# Altium PCB SolarNode.PcbDoc (part 1 of 2)
Units mil, origin at the board's own origin, x right, y up, seen from the top; angles counter-clockwise.
Board outline 7598.43 x 6553.62 mil, 2 copper layers (Top Layer, Bottom Layer); 223 components, 193 nets, 759 pads, 133 vias.
Unrouted connection lines stored in the file: 164.
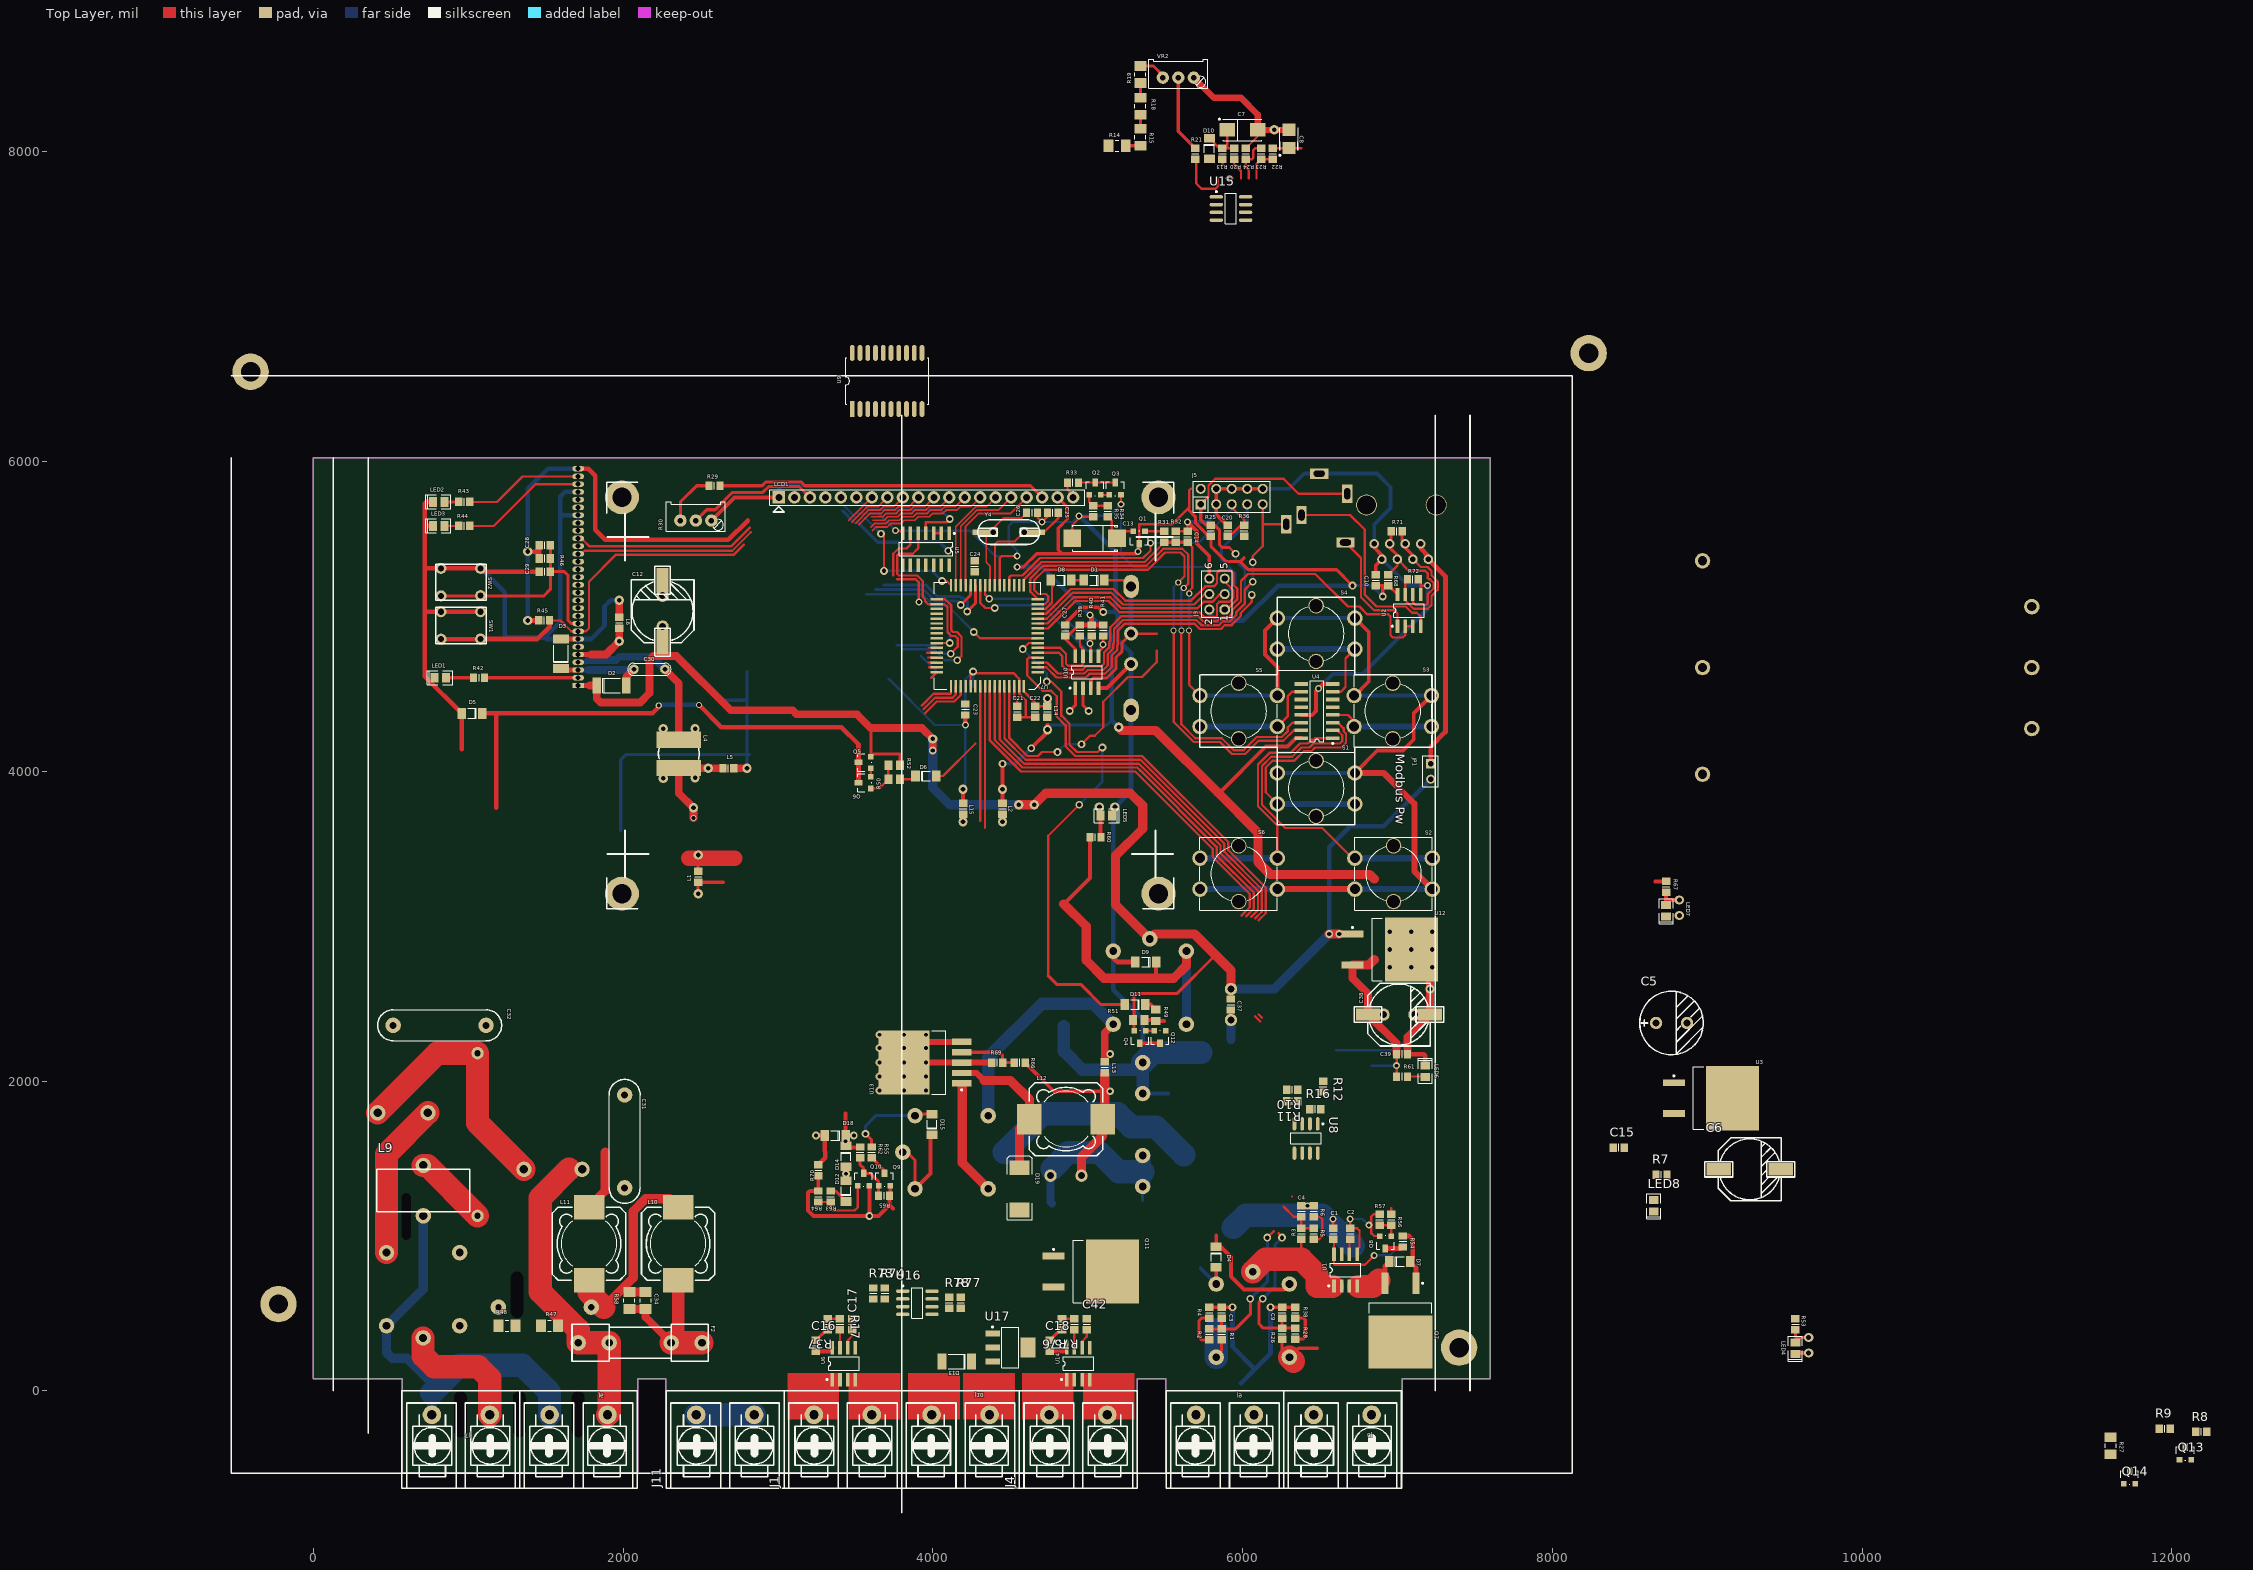
[diagram p0: Top Layer view]
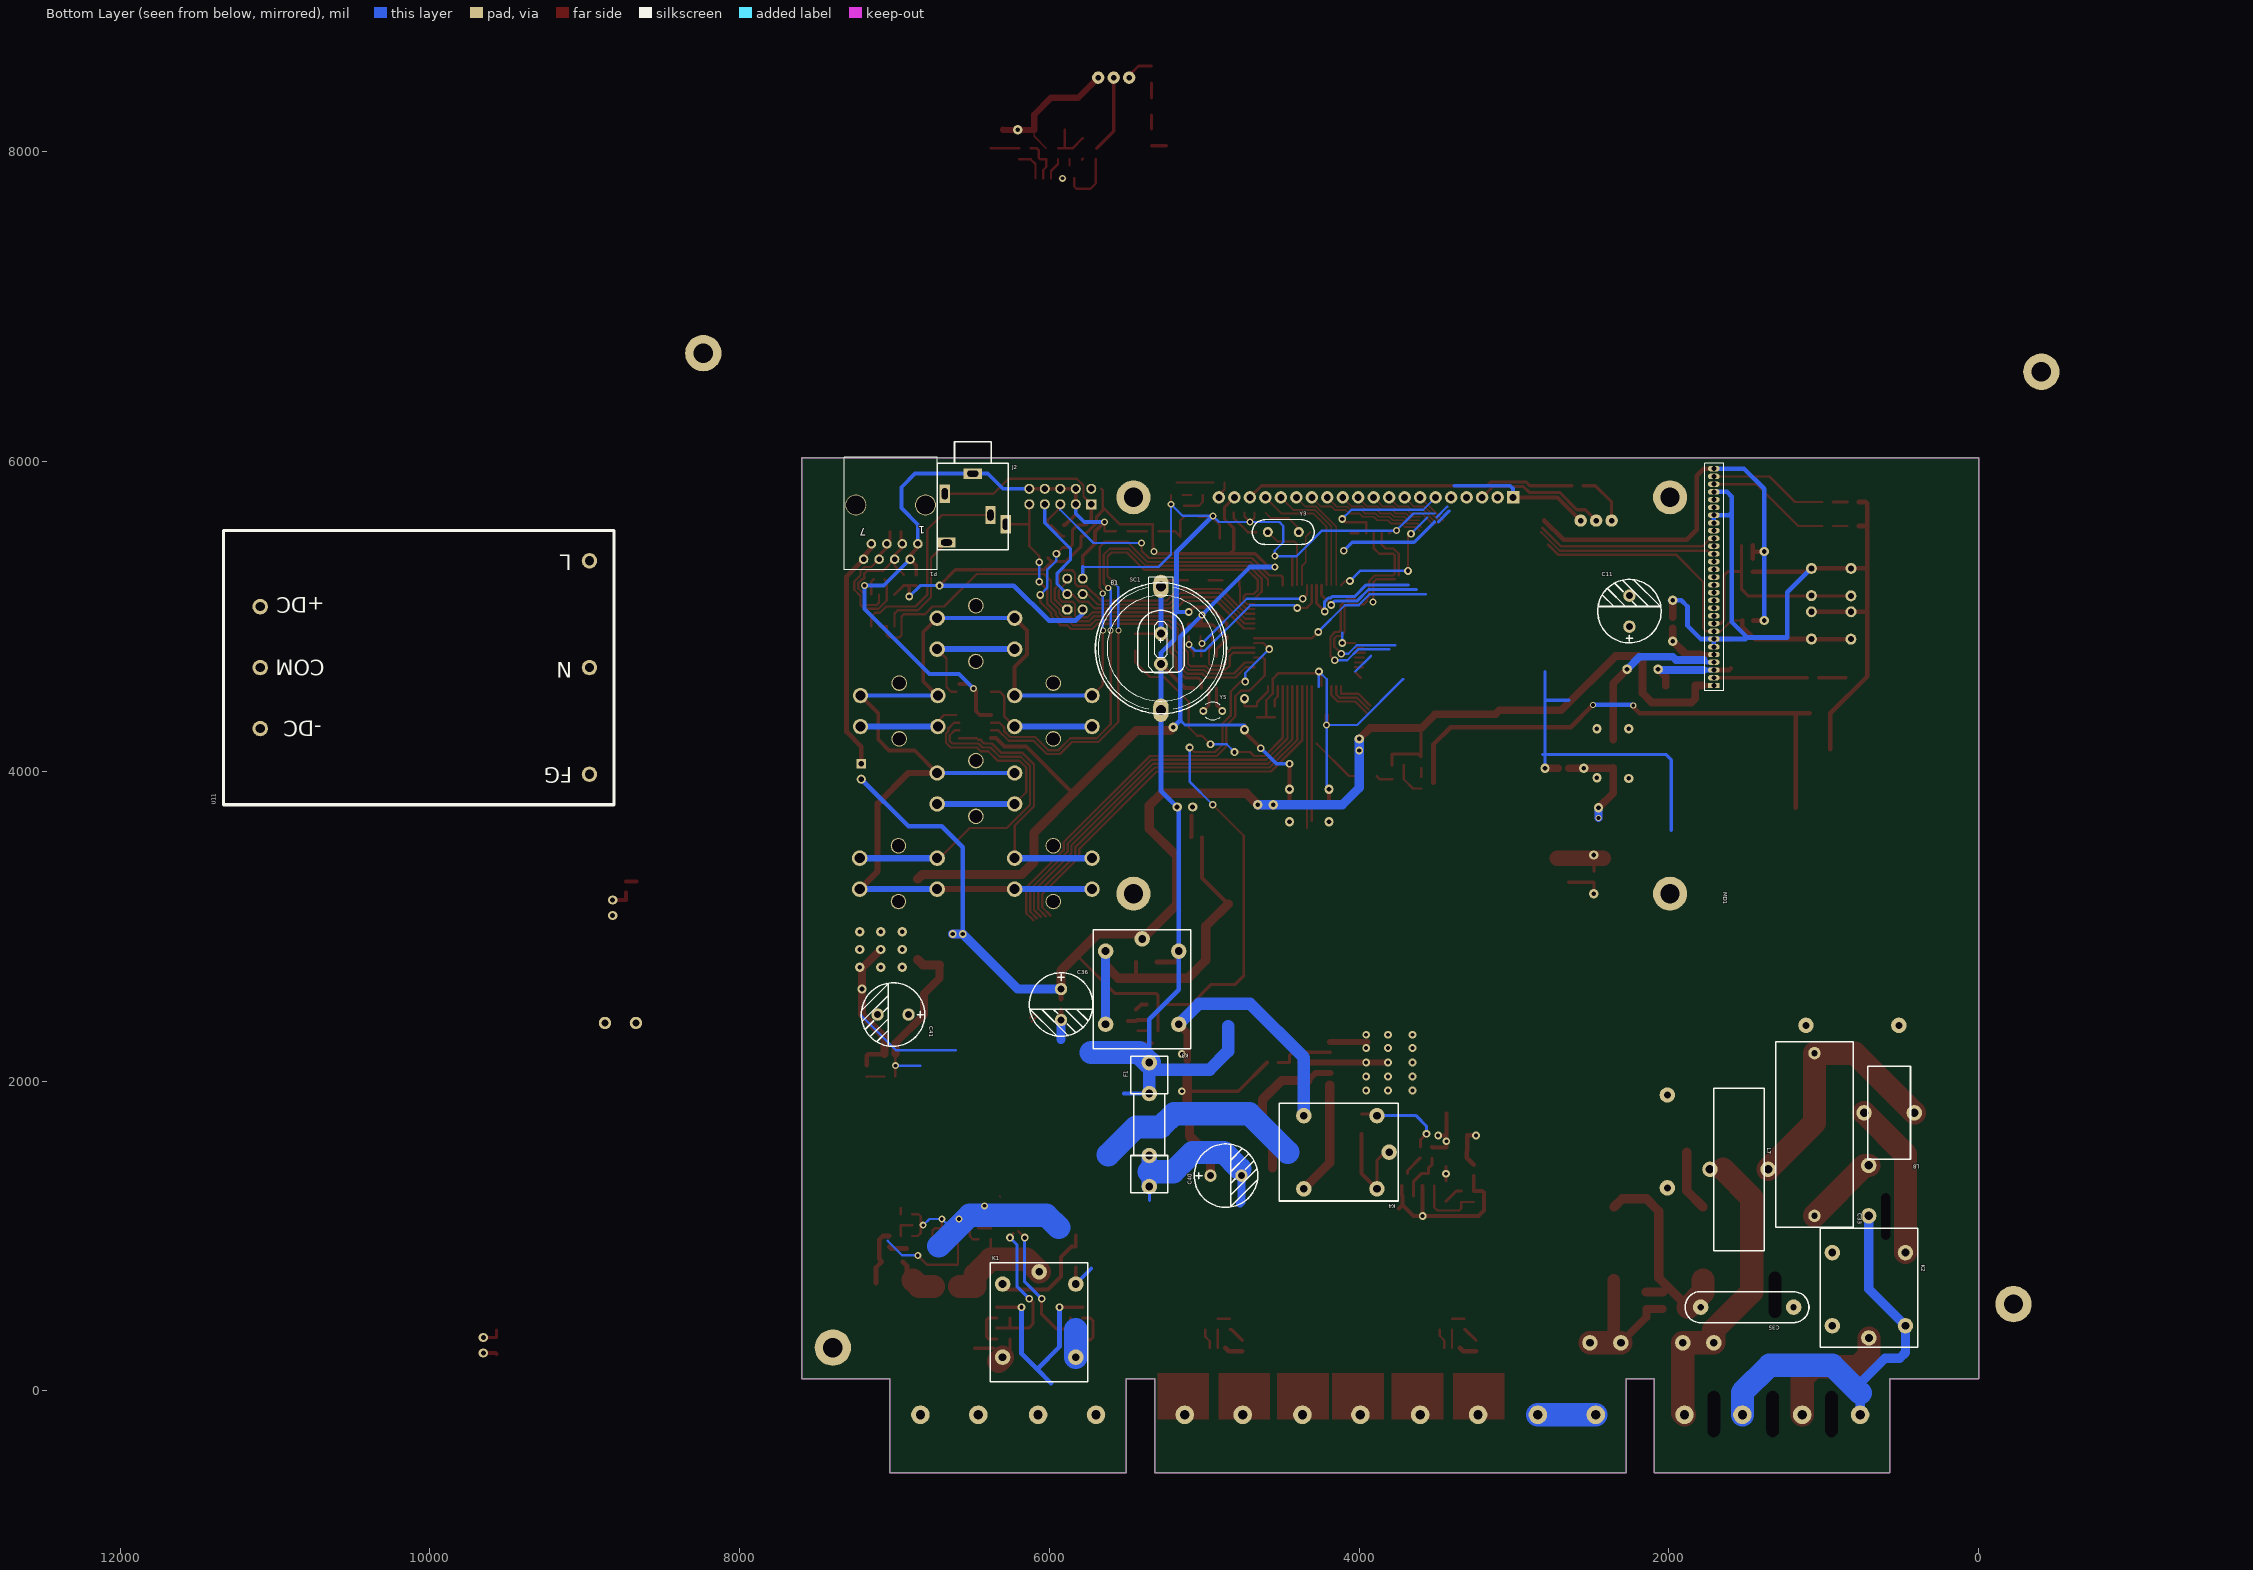
[diagram p1: Bottom Layer view, seen from below]

## Layer stack, top to bottom
Top Layer: signal copper 1.4
Dielectric: dielectric 12.6, FR-4, Dk 4.8
Bottom Layer: signal copper 1.4

## Board outline
575,-530 2095,-530 2095,78.74 2275,78.74 2275,-530 5320,-530 5320,78.74 5505,78.74 5505,-530 7030,-530 7030,78.74 7598.43,78.74 7598.43,6023.62 0,6023.62 0,78.74 575,78.74

## Design rules (kind name [scope] priority, off if disabled: settings)
Clearance padfree [InPolygon vs InNet('No Net') and IsPad] p1: gap=30
Clearance Pad-Pad [IsPad vs IsPad] p2: gap=1
Clearance "poly - net VA" [InNet('VA') vs InNet('GND')] p3: gap=30
Clearance "Poly - All" [InPolygon] p4: gap=15
Clearance Pad-Track [IsTrack vs IsPad] p5: gap=10
Clearance Genaral [All] p6: gap=10
ComponentClearance [All] p1 off: gap=10 collisioncheckmode=3 verticalgap=10 showdistances=FALSE
HoleSize [All] p1: absolutevalues=TRUE maxlimit=500 minlimit=1 maxpercent=80.000 minpercent=20.000
PolygonConnect [All] p1: connectstyle=Relief reliefconductorwidth=20 reliefentries=4 polygonreliefangle="90 Angle"
RoomDefinition U_PSU [InComponentClass('U_PSU')] p1 off: confinementstyle=ConfineIn formatcopy=TRUE lockcomponents=FALSE outline -1970,-2025 30,-2025 30,-1025 -1970,-1025
RoomDefinition U_PLmodule [InComponentClass('U_PLmodule')] p2 off: confinementstyle=ConfineIn formatcopy=TRUE lockcomponents=FALSE outline -1970,-2025 30,-2025 30,-1025 -1970,-1025
RoomDefinition U_Mcu [InComponentClass('U_Mcu')] p3 off: confinementstyle=ConfineIn formatcopy=TRUE lockcomponents=FALSE outline -1970,-2025 30,-2025 30,-1025 -1970,-1025
RoomDefinition U_HUD [InComponentClass('U_HUD')] p4 off: confinementstyle=ConfineIn formatcopy=TRUE lockcomponents=FALSE outline -1970,-2025 30,-2025 30,-1025 -1970,-1025
RoomDefinition U_Actuator [InComponentClass('U_Actuator')] p5 off: confinementstyle=ConfineIn formatcopy=TRUE lockcomponents=FALSE outline -1970,-2025 30,-2025 30,-1025 -1970,-1025
RoomDefinition U_ACmonitor [InComponentClass('U_ACmonitor')] p6 off: confinementstyle=ConfineIn formatcopy=TRUE lockcomponents=FALSE outline -1970,-2025 30,-2025 30,-1025 -1970,-1025
RoutingVias [All] p1: holewidth=25 width=40 viastyle="Through Hole" minholewidth=10 minwidth=30 maxholewidth=100 maxwidth=150
SilkscreenOverComponentPads [All] p1: minsilkscreentomaskgap=10
SolderMaskExpansion [All] p1: expansion=4
Width [All] p1: maxlimit=1000 minlimit=10 preferedwidth=15
25 further rules are at their usual default settings.

## Classes and differential pairs
component class U_Mcu: B1 C10 C20 C21 C22 C23 C24 C25 C26 C27 D1 D8 J2 J3 J5 JP1 L14 P1 Q13 Q14 R8 R9 R25 R27 R36 R39 R40 R41 R68 R71 R72 SC1 U2 U5 U7 U9 U10 Y3 Y4 Y5
component class U_Actuator: D4 D5 D6 D7 D11 F1 J7 J8 J9 K1 K2 LED4 Q4 Q5 Q6 Q7 Q8 Q12 R49 R50 R51 R52 R53 R54 R56 R57
component class U_HUD: C13 C14 LCD1 Q1 Q2 Q3 R29 R30 R31 R32 R33 R34 R35 S1 S2 S3 S4 S5 S6 U4
component class U_PSU: C5 C6 C11 C12 C15 C32 C33 C34 C35 C36 C37 C38 C39 C40 C41 D9 D12 D14 D15 D18 D19 F2 K3 K4 L7 L8 L9 L10 L11 L12 L13 LED5 LED6 LED7 LED8 Q9 Q10 Q11 R7 R55 R58 R60 R61 R62 R63 R64 R65 R66 R67 R69 R70 U3 U11 U12 U13
component class U_ACmonitor: C1 C2 C3 C4 C7 C8 C9 C16 C17 C18 C42 D10 D13 J1 J4 J6 J10 J11 L1 L2 L15 R1 R2 R3 R4 R5 R6 R10 R11 R12 R13 R14 R15 R16 R17 R18 R19 R20 R21 R22 R23 R24 R26 R28 R37 R38 R73 R74 R75 R76 R77 R78 U1 U6 U8 U14 U15 U16 U17 VR2
component class U_PLmodule: C28 C29 C30 C31 D2 D3 L4 L5 L6 LED1 LED2 LED3 MD1 R42 R43 R44 R45 R46 R47 R48 SW1 SW2

## Components (designator, comment, footprint, x,y, rotation, side; value= is the part's Value field where it differs from the comment)
B1 "+3V" pincucao 5280,5194.57 r180 bottom
C1 "104" 6-0805_N 6585,1014.21 r90 top
C2 "102" 6-0805_N 6695,1014.21 r90 top
C3 "104" 6-0805_N 5865,504.21 r90 top
C4 "104" 6-0805_N 6380,1159.21 r90 top
C5 "1000u25V" CAP40x20 8670,2375 r0 top
C6 "330uF/35v" EEE-G 9275,1430 r180 top
C7 "100u16V" TC6032-2412 6000,8141.85 r0 top
C8 "1u16V" TC3528-1411 6300,8084.21 r90 top
C9 "104" 6-0805_N 6255,504.21 r90 top
C10 "104" 6-0805_N 6860,5234.21 r90 top
C11 "1000u25V" CAP40x20 2255,4934.21 r90 bottom (schematic designator C40)
C12 "330uF/35v" EEE-G 2255,5034.21 r270 top (schematic designator C38)
C13 "107" SMC_D/WA 5190,5504.57 r180 top
C14 "CAP" 6-0805_N 5645,5514.13 r90 top
C15 "104" 6-0805_N 8430,1570 r0 top
C16 "104" 6-0805_N 3245.2,290 r90 top
C17 "102" 6-0805_N 3480.2,430 r90 top
C18 "104" 6-0805_N 4754.21,290 r90 top
C20 "104" 6-0805_N 5905,5554.21 r90 top
C21 "104" 6-0805_N 4545,4384.21 r270 top
C22 "104" 6-0805_N 4660,4384.57 r90 top
C23 "104" 6-0805_N 4210,4399.57 r270 top
C24 "104" 6-0805_N 4270,5324.21 r90 top
C25 "22p" 6-0805_N 4775.43,5669.57 r0 top
C26 "22p" 6-0805_N 4640.43,5669.57 r180 top
C27 "104" 6-0805_N 4855,4909.21 r90 top
C28 "68p" 6-0805_N 1495,5459.21 r180 top
C29 "68p" 6-0805_N 1495,5289.21 r180 top
C30 "1uF metalized polyester" CSIP3 2070,4659.21 r0 top
C31 "0.033uF/300VAC" 100n400v#1 2010,1310 r90 top
C32 "0.1uF/300VAC" 100n400v#1 515,2360 r0 top
C33 "1uF/300VAC" CAP1.2/0.5 1060,2180 r270 bottom
C34 "15nF" 3216[1206] 2145.43,583.19 r90 top
C35 "470nF/300VAC" 100n400v#2 1195,540 r0 bottom
C36 "1000u25V" CAP40x20 5925,2594.21 r270 bottom
C37 "104" 6-0805_N 5925,2494.21 r270 top
C38 "330uF/35v" EEE-G 7010,2429.21 r180 top
C39 "104" 6-0805_N 7030,2174.21 r0 top
C40 "1000u25V" CAP40x20 4960,1389.21 r180 bottom
C41 "1000u25V" CAP40x20 6910,2429.21 r0 bottom (schematic designator C40)
C42 "102" 6-0805_N 4994.21,430 r90 top
D1 "1N4148" SOD-80/MLL34 5040,5234.57 r0 top
D2 "FR207" MELF-D5022-2009 1925,4554.21 r180 top
D3 "FR207" MELF-D5022-2009 1600,4759.21 r270 top
D4 "1N4148" SOD-80/MLL34 5830,864.21 r90 top
D5 "1N4148" SOD-80/MLL34 1025,4374.21 r0 top
D6 "Z9V" SOD-80/MLL34 3955,3969.21 r180 top
D7 "Z12V" SOD-80/MLL34 7015,834.21 r180 top
D8 "1N4148" SOD-80/MLL34 4828.07,5234.57 r0 top (schematic designator D1)
D9 "1N4148" SOD-80/MLL34 5375,2769.21 r0 top
D10 "1N4148" SOD-80/MLL34 5785,8021.85 r90 top
D11 "Z9V" SOD-80/MLL34 5305,2494.21 r0 top
D12 "1N4148" SOD-80/MLL34 3440,1289.21 r270 top
D13 "1N4007" MELF-D5022-2009 4155,190 r0 top (schematic designator D2)
D14 "Z15V" SOD-80/MLL34 3440,1514.21 r90 top
D15 "1N4148" SOD-80/MLL34 3995,1719.21 r270 top
D18 "Z12V" SOD-80/MLL34 3370,1649.21 r0 top
D19 "SS24/34" DSO-C2/X3.3 4560,1304.21 r90 top
F1 "FUSE 15A" FUSE2 5355,1919.21 r270 bottom
F2 "FUSE 5A" FUSE2 1910,310 r0 top
J1 "Current charge meter1" TERMINAL2 3419.21,-155 r180 top
J2 "COM_PORT1_TTL" SJ-3515 6495,5989.21 r180 bottom
J3 "SPI EX" HDR2X3 5885,5044.21 r90 top
J4 "Current charge meter2" TERMINAL2 4939.21,-155 r180 top
J5 "HEADER 5X2" IDC10 5730,5724.21 r0 top
J6 "220 VAC IN" TERMINAL2 1712.2,-155 r0 top
J7 "600W AC/DC MODULE" TERMINAL2 952.2,-155 r180 top
J8 "95-150W 12/24VDC LED LAMP" TERMINAL2 6646.22,-155 r180 top
J9 "600W VIN" TERMINAL2 5886.22,-155 r0 top
J10 "N_BAT2" TERMINAL2 4179.21,-155 r0 top
J11 "N_BAT1" TERMINAL2 2659.21,-155 r180 top
JP1 "Modbus Pw" HDR1X2 7215,4049.21 r270 top
K1 "12V 10A" RELAYVUONG 5830,689.21 r0 bottom
K2 "12V 10A" RELAYVUONG 945,420 r180 bottom
K3 "12V 10A" RELAYVUONG 5165,2839.21 r0 bottom
K4 "12V 10A" RELAYVUONG 3885,1304.21 r90 bottom
L1 "Choke" 6-0805_N 2485,3319.21 r270 top
L2 "Choke" 6-0805_N 4450,3759.21 r90 top
L4 "39uH" 6D28 2360,4204.21 r0 top
L5 "1mH" 6-0805_N 2680,4019.21 r0 top
L6 "680uH" 6-0805_N 1975,4959.21 r90 top
L7 "Inductor" IND26x8 1735,1430 r90 bottom
L8 "Inductor" IND15X7 415,1795 r270 bottom
L9 "Inductor" IND15x7 710,1455 r0 top
L10 "100uH 1A" IND1207 2355,950 r180 top
L11 "100uH 1A" IND1207 1780,950 r180 top
L12 "330uH" IND1207 4860,1754.21 r90 top
L13 "10uH" 6-0805_N 5110,2089.21 r90 top
L14 "10uH" 6-0805_N 4740,4384.57 r90 top
L15 "Choke" 6-0805_N 4195,3759.21 r90 top
LCD1 "ST7920" LCD12864B 3725,4489.57 r180 top
LED1 "TXON_LED" "SMD _LED" 820,4604.21 r0 top
LED2 "PKD_LED" "SMD _LED" 810,5739.21 r0 top
LED3 "BIU_LED" "SMD _LED" 810,5584.21 r0 top
LED4 "VMAIN LED" "SMD _LED" 9570,274.21 r90 top
LED5 "LED_MDL" "SMD _LED" 5120,3714.21 r180 top
LED6 "LED_PW" "SMD _LED" 7180,2064.21 r270 top
LED7 "LED_BAT" "SMD _LED" 8735,3099.21 r90 top
LED8 "LED_PW" "SMD _LED" 8655,1195 r90 top
MD1 "PL3120 Module" ECHELONMODULE 1710,4554.21 r270 bottom
P1 "MODBUS" BU_TEL8H_AMP 7025,5369.21 r0 bottom
Q1 "2N3904" SOT-23 5370,5549.57 r180 top
Q2 "2N3904" SOT-23 5010,5784.57 r0 top
Q3 "2N3904" SOT-23 5140,5784.57 r0 top
Q4 "2N3906" SOT-23 5375,2324.21 r180 top
Q5 "2N3906" SOT-23 3600,4019.21 r90 top
Q6 "2N3906" SOT-23 3600,3889.21 r90 top
Q7 "MOSFET-P" TO254P1420-3_4M 7020,454.21 r270 top
Q8 "2N2222" SOT-23 6960,999.21 r180 top
Q9 "2N2222" SOT-23 3650,1324.21 r0 top
Q10 "2N2222" SOT-23 3515,1324.21 r0 top
Q11 "MOSFET-P" TO254P1420-3_4M 5020,770 r0 top
Q12 "2N3906" SOT-23 5505,2324.21 r180 top
Q13 "PMOS-2" SOT-23 12050,-445 r0 top
Q14 "NMOS-2" SOT-23 11690,-600 r0 top
R1 "150k" 6-0805_N 5865,364.21 r90 top
R2 "12k" 6-0805_N 5785,364.21 r270 top
R3 "150k" 6-0805_N 6380,1014.21 r90 top
R4 "18k" 6-0805_N 5785,504.21 r90 top
R5 "12k" 6-0805_N 6460,1014.21 r270 top
R6 "18k" 6-0805_N 6460,1159.21 r90 top
R7 "2K" 6-0805_N 8705,1395 r0 top
R8 "0" 6-0805_N 12190,-265 r0 top
R9 "0R" 6-0805_N 11955,-245 r0 top
R10 "10k" 6-0805_N 6320,1944.21 r180 top
R11 "100k" 6-0805_N 6320,1869.21 r180 top
R12 "100k" 6-0805_N 6520,1964.21 r270 top
R13 "10k" 6-0805_N 5870,7986.85 r270 top
R14 "220k" 3216[1206] 5190,8039.21 r180 top
R15 "220k" 3216[1206] 5340,8094.21 r90 top
R16 "10k" 6-0805_N 6470,1819.21 r0 top
R17 "10k" 6-0805_N 3400.2,430 r270 top
R18 "220k" 3216[1206] 5340,8294.21 r270 top
R19 "220k" 3216[1206] 5340,8499.21 r90 top
R20 "10k" 6-0805_N 5945,7986.85 r90 top
R21 "10k" 6-0805_N 5695,7986.85 r90 top
R22 "10k" 6-0805_N 6195,7986.85 r270 top
R23 "33k" 6-0805_N 6120,7986.85 r90 top
R24 "10k" 6-0805_N 6020,7986.85 r90 top
R25 "470" 6-0805_N 5795,5554.21 r90 top
R26 "150k" 6-0805_N 6255,369.21 r90 top
R27 "10K" 3216[1206] 11605,-355 r90 top
R28 "12k" 6-0805_N 6340,369.21 r270 top
R29 "1K" 6-0805_N 2590,5844.21 r0 top
R30 "10K" BTXANH 2570,5619.21 r180 top
R31 "2K2" 6-0805_N 5495,5514.57 r90 top
R32 "1K8" 6-0805_N 5570,5514.13 r270 top
R33 "1R0" 6-0805_N 4905,5864.57 r180 top
R34 "47K" 6-0805_N 5130,5679.57 r270 top
R35 "10K" 6-0805_N 5035,5679.57 r90 top
R36 "100k" 6-0805_N 6010,5554.21 r270 top
R37 "100k" 6-0805_N 3320.2,430 r270 top
R38 "18k" 6-0805_N 6340,504.21 r90 top
R39 "1K" 6-0805_N 4950,4909.57 r90 top
R40 "1K" 6-0805_N 5025,4909.57 r90 top
R41 "1K" 6-0805_N 5100,4909.57 r90 top
R42 "1k" 6-0805_N 1070,4604.21 r180 top
R43 "1k" 6-0805_N 975,5739.21 r180 top
R44 "1k" 6-0805_N 975,5584.21 r180 top
R45 "1k" 6-0805_N 1490,4974.21 r0 top
R46 "1k" 6-0805_N 1495,5374.21 r0 top
R47 "560K 1/4W" 3216[1206] 1525,420 r0 top
R48 "560K 1/4W" 3216[1206] 1250,420 r0 top
R49 "2k2" 2012[0805] 5440,2424.21 r270 top
R50 "2k2" 2012[0805] 3750,3949.21 r180 top
R51 "2k2" 2012[0805] 5330,2394.21 r180 top
R52 "2k2" 2012[0805] 3750,4039.21 r0 top
R53 "2K" 6-0805_N 9570,429.21 r90 top
R54 "1K" 6-0805_N 7035,964.21 r90 top
R55 "10" 6-0805_N 3605,1539.21 r90 top (schematic designator R67)
R56 "1K" 6-0805_N 6960,1104.21 r270 top
R57 "10K" 6-0805_N 6885,1104.21 r270 top
R58 "330" 3216[1206] 2040.43,583.19 r270 top
R60 "2K" 6-0805_N 5050,3574.21 r180 top
R61 "2K" 6-0805_N 7030,2029.21 r180 top
R62 "10K" 6-0805_N 3530,1539.21 r90 top
R63 "1K" 6-0805_N 3340,1254.21 r90 top
R64 "10K" 6-0805_N 3260,1254.21 r270 top
R65 "10K" 6-0805_N 3685,1259.21 r180 top
R66 "5K6" 6-0805_N 4560.43,2119.21 r0 top
R67 "2K" 6-0805_N 8735,3254.21 r90 top
R68 "1K" 6-0805_N 6940,5234.21 r90 top
R69 "1K8" 6-0805_N 4415.43,2119.21 r180 top
R70 "1K" 6-0805_N 3260,1424.21 r90 top
R71 "300" 6-0805_N 6995,5549.21 r0 top
R72 "1K" 6-0805_N 7100,5239.21 r0 top
R73 "100k" 6-0805_N 3615.43,628.43 r90 top
R74 "10k" 6-0805_N 3690.43,628.43 r90 top
R75 "10k" 6-0805_N 4914.21,430 r270 top
R76 "100k" 6-0805_N 4834.21,430 r270 top
R77 "100k" 6-0805_N 4180.43,568.43 r90 top
R78 "10k" 6-0805_N 4105.43,568.43 r90 top
S1 "SW-PB" CTCHIP_TO 6225,3789.21 r90 top
S2 "SW-PB" CTCHIP_TO 7225,3439.21 r270 top
S3 "SW-PB" CTCHIP_TO 6720,4289.21 r90 top
S4 "SW-PB" CTCHIP_TO 6225,4789.21 r90 top
S5 "SW-PB" CTCHIP_TO 5725,4289.21 r90 top
S6 "SW-PB" CTCHIP_TO 6225,3439.21 r270 top
SC1 "1F 5.5V" SUPERCAP 5280,4889.57 r270 bottom
SW1 "SERVICE" SW-4P-S 1080,4854.21 r180 top
SW2 "RESET" SW-4P-S 1080,5134.21 r180 top
U1 "ACS712" SO8 6665,779.21 r0 top
U2 "DS75176BN(8)" SO8 7075,5039.21 r0 top
U3 "78M05" TO254P1420-3_4M 9025,1890 r0 top (schematic designator U12)
U4 "4017" SO16 6480,4389.21 r90 top
U5 "74HC02" SO14 3955,5434.21 r180 top
U6 "ACS712" SO8 3425.2,175 r0 top (schematic designator U1)
U7 "ATmega128" QFP64-3 4678.42,4640.46 r180 top
U8 "LM358AM" M08A_N 6410,1629.21 r270 top
U9 "74HC573" SO20W 3480,6339.21 r90 top
U10 "DS1307" SO8 4995,4639.57 r0 top
U11 "ATC-12S" "ATC MODULE" 8970,4670 r0 bottom
U12 "78M05" TO254P1420-3_4M 6950,2849.21 r0 top
U13 "LM2576" TO170P1420-6N 3950,2119.21 r180 top
U14 "ACS712" SO8 4939.21,175 r0 top (schematic designator U1)
U15 "LM358AM" M08A_N 5925,7634.21 r0 top
U16 "LM358AM" M08A_N 3900.43,568.43 r0 top
U17 "LM1117IMP-5V" MP04A_N 4500,280 r0 top
VR2 "1K" BTXANH 5685,8479.21 r180 top
Y3 "14.7456MHz" XTAL 4590,5544.57 r180 bottom
Y4 "14.7456MHz" XTAL-SMD 4665,5544.57 r180 top
Y5 "32,768k" R38 4945,4389.57 r270 bottom

## Footprints (in the part's own frame and the unit in brackets; to place one, negate y for a bottom-side part, rotate by r counter-clockwise, add the part's x,y. Pads: shape width x height; smd on the part's side, far side on the other; paste and mask are expansions set on the pad)
6-0805_N [mm] "Chip Resistor, Body 2.0x1.2mm, IPC Medium Density"
  rect 1.2x1.4 smd: 1(-0.9,0) 2(0.9,0)
  silkscreen extent 0,-0.6 0,0.6, body extent -1.07,-0.7 1.07,0.7, height 0.7
6D28 [mm] "inductor 6D28"
  rect 7.3x2.65 smd: 1(0,0) 2(0,-4.65)
  silkscreen extent -3.35,-3.19 3.35,-1.38
100n400v#1 [mil]
  round 100 hole 45: 1(0,0) 2(600,0)
  silkscreen extent -99,-101 700,101
100n400v#2 [mil]
  round 100 hole 40: 1(0,0) 2(600,0)
  silkscreen extent -99,-101 700,101
2012[0805] [mm] "Metal Electrode Face (MELF) Resistor; Body 2 x 1.4 mm (LxDia)"
  rect 1.3x1.6 smd: 1(-0.95,0) 2(0.95,0)
3216[1206] [mm] "Metal Electrode Face (MELF) Resistor; Body 3.2 x 1.8 mm (LxDia)"
  rect 1.6x2 smd: 1(-1.4,0) 2(1.4,0)
  silkscreen extent -0.3,-0.9 0.3,0.9
"ATC MODULE" [mm] "AC - DC convert module"
  round 2.54 hole 1.524: 1(0,17.5) 2(0,0) 3(0,-17.5) 4(54,10) 5(54,0) 6(54,-10)
  silkscreen extent -4,-22.5 60,22.5
BTXANH [mil]
  round 80 hole 35: 1(0,0) 2(100,0) 3(200,0)
  silkscreen extent -90,-120 290,70
BU_TEL8H_AMP [mil]
  round 62 hole 35: 1(-175,-100) 2(-125,0) 3(-75,-100) 4(-25,0) 5(25,-100) 6(75,0) 7(125,-100) 8(175,0)
  round 135 hole 125: BO1(-225,-350) BO2(225,-350)
  silkscreen extent -300,-658 300,67
CAP1.2/0.5 [mil]
  round 80 hole 40: 1(0,0) 2(1050,0)
  silkscreen extent -75,-250 1125,250
CAP40x20 [mil]
  round 80 hole 45: 1(0,0) 2(200,0)
  silkscreen extent -105,-205 305,205
CSIP3 [mil]
  round 62 hole 32: 1(0,0) 2(200,0)
  silkscreen extent -40,-40 240,40
CTCHIP_TO [mil]
  round 100 hole 85: 0(-80,-250) 0(280,-250)
  round 100 hole 65: 1(0,0) 1(0,-500) 2(200,0) 2(200,-500)
  silkscreen extent -135,-500 335,0
DSO-C2/X3.3 [mm] "DO-214-AB/SMC; 2 C-Bend Leads; Body 7.9 x 5.9 mm, inc. leads (LxW)"
  rect 2.4x3.3 smd: 1(-3.475,0) 2(3.475,0)
  silkscreen extent -5.07,-2.05 5.43,2.05
ECHELONMODULE [mil]
  rect 35x75 hole 32: 1(0,0)
  oval 35x75 hole 32: 2(-50,0) 3(-100,0) 4(-150,0) 5(-200,0) 6(-250,0) 7(-300,0) 8(-350,0) 9(-400,0) 10(-450,0) 11(-500,0) 12(-550,0) 13(-600,0) 14(-650,0) 15(-700,0) 16(-750,0) 17(-800,0) 18(-850,0) 19(-900,0) 20(-950,0) 21(-1000,0) 22(-1050,0) 23(-1100,0) 24(-1150,0) 25(-1200,0) 26(-1250,0) 27(-1300,0) 28(-1350,0) 29(-1400,0)
  silkscreen extent -1435,-60 35,65
EEE-G [mm] "aluminum Electrolytic Capacitor 10mm X 10mm"
  rect 4x2 smd: 1(5.08,0) 2(-5.08,0)
  silkscreen extent -7.37,-5.15 7.37,5.15
FUSE2 [mil]
  round 100 hole 50: 1(-200,0) 1(0,0) 2(400,0) 2(600,0)
  silkscreen extent -240,-120 640,120
HDR1X2 [mm] "Connector; Header; 2 Position"
  rect 1.5x1.5 hole 0.9: 1(0,0)
  round 1.5 hole 0.9: 2(2.54,0)
  silkscreen extent -1.27,-1.27 3.81,1.27
HDR2X3 [mil] "Connector; Header; 3x2 Position"
  oct 65x65 hole 40: 1(0,0)
  round 65 hole 40: 2(0,100) 3(100,0) 4(100,100) 5(200,0) 6(200,100)
  silkscreen extent -50,-50 250,150
IDC10 [mil]
  rect 65x65 hole 40: 1(0,0)
  round 65 hole 40: 2(0,100) 3(100,0) 4(100,100) 5(200,0) 6(200,100) 7(300,0) 8(300,100) 9(400,0) 10(400,100)
  silkscreen extent -50,-50 450,150
IND15X7 [mil]
  round 100 hole 55: 1(0,0) 2(0,-325)
  silkscreen extent -300,-300 300,-25
IND15x7 [mil]
  round 100 hole 55: 1(0,0) 2(0,-325)
  silkscreen extent -300,-300 300,-25
IND26x8 [mil]
  round 100 hole 55: 1(0,0) 2(0,-375)
  silkscreen extent -525,-350 525,-25
IND1207 [mm] "inductor 1207"
  rect 5x4 smd: 1(0,6) 2(0,-6)
  silkscreen extent -6,-6 6,6
LCD12864B [mil] "LCD 128x64"
  round 220 hole 125: 0(-1732.28,1279.53) 0(-1732.28,-1279.53) 0(1732.28,1279.53) 0(1732.28,-1279.53)
  rect 80x80 hole 45: 1(718.98,-1279.53)
  round 80 hole 45: 2(618.9,-1279.53) 3(518.9,-1279.53) 4(418.9,-1279.53) 5(318.9,-1279.53) 6(218.9,-1279.53) 7(118.9,-1279.53) 8(18.9,-1279.53) 9(-81.1,-1279.53) 10(-181.1,-1279.53) 11(-281.1,-1279.53) 12(-381.1,-1279.53) 13(-481.1,-1279.53) 14(-581.1,-1279.53) 15(-681.1,-1279.53) 16(-781.1,-1279.53) 17(-881.1,-1279.53) 18(-981.1,-1279.53) 19(-1081.1,-1279.53) 20(-1181.1,-1279.53)
  silkscreen extent -1831,-1378 1831,1378
M08A_N [mm] "SOIC, 8-Leads, Body 4.9x3.9mm, Pitch 1.27mm, IPC Medium Density"
  oval 2.2x0.6 smd: 1(-2.4,1.905) 2(-2.4,0.635) 3(-2.4,-0.635) 4(-2.4,-1.905) 5(2.4,-1.905) 6(2.4,-0.635) 7(2.4,0.635) 8(2.4,1.905)
  silkscreen extent -2.52,-2.5 0.9,2.88, body extent -2,-2.5 2,2.5, height 1.75
MELF-D5022-2009 [mm] "Metal Electrode Face (MELF) Diode; Body 5 x 2.5 mm (LxDia)"
  rect 1.45x2.6 smd: 1(-2.425,0) 2(2.425,0)
  silkscreen extent -1.4,-1.2 1.4,1.2
MP04A_N [mm] "SOT223, 4-Leads, Body 6.5x3.5mm, Pitch 2.3mm, Lead Span 7mm, IPC Medium Density"
  rect 2.4x1 smd: 1(-2.9,2.3) 2(-2.9,0) 3(-2.9,-2.3)
  rect 2.4x3.3 smd: 4(2.9,0)
  silkscreen extent -3.02,-3.35 1.4,3.47, body extent -1.85,-3.35 1.85,3.35, height 1.8
pincucao [mil]
  oval 100x150 hole 65: 1(0,0) 2(0,-800)
  silkscreen extent -403,-795 403,60
QFP64-3 [mil]
  rect 80x16 smd: 1(0,0) 2(0,-31) 3(0,-62) 4(0,-94) 5(0,-125) 6(0,-157) 7(0,-188) 8(0,-219) 9(0,-251) 10(0,-282) 11(0,-314) 12(0,-345) 13(0,-376) 14(0,-408) 15(0,-439) 16(0,-471) 33(652,-471) 34(652,-439) 35(652,-408) 36(652,-376) 37(652,-345) 38(652,-314) 39(652,-282) 40(652,-251) 41(652,-219) 42(652,-188) 43(652,-157) 44(652,-125) 45(652,-94) 46(652,-62) 47(652,-31) 48(652,0)
  rect 16x80 smd: 17(90,-561) 18(121,-561) 19(153,-561) 20(184,-561) 21(216,-561) 22(247,-561) 23(278,-561) 24(310,-561) 25(341,-561) 26(373,-561) 27(404,-561) 28(435,-561) 29(467,-561) 30(498,-561) 31(530,-561) 32(561,-561) 49(561,90) 50(530,90) 51(498,90) 52(467,90) 53(435,90) 54(404,90) 55(373,90) 56(341,90) 57(310,90) 58(278,90) 59(247,90) 60(216,90) 61(184,90) 62(153,90) 63(121,90) 64(90,90)
  silkscreen extent -20,-580 670,110
R38 [mm] "Crystal, Thru-Hole; 2 Leads; Body 3.1 x 8.2 mm (Dia.xH)"
  round 1.3 hole 0.7: 1(0,1.55) 2(0,-1.55)
  silkscreen extent -1.55,-1.19 1.55,1.17
RELAYVUONG [mm]
  round 2.54 hole 1.27: 1(6,-2) 2(0,12) 3(12,12) 4(12,0) 5(0,0)
  silkscreen extent -2,-3.5 14,16
SJ-3515 [mm] "3.5mm AUDIO JACK-STEREO"
  rect 3x1.7 hole 1 slot 1.8 at 0 deg: 1(0,-1.7) 5(-4.3,-13)
  rect 1.7x3 hole 1 slot 1.8 at 90 deg: 2(-4.6,-5) 3(2.9,-8.5) 4(5.4,-10)
  silkscreen extent -5.8,-14.21 5.8,3.5
SMC_D/WA [mil]
  rect 115x115 smd: 1(0,0) 2(290,0)
  silkscreen extent -5,-85 285,85
"SMD _LED" [mm]
  rect 1.3x1.6 smd: 1(0.95,0) 2(-0.95,0)
  silkscreen extent -2.13,-1.15 2,1.15
SO8 [mm] "Small Outline; 8 Leads; Body Width 3.9 mm; Pitch 1.27 mm"
  rect 0.6x2.2 smd: 1(-1.905,-2.6) 2(-0.635,-2.6) 3(0.635,-2.6) 4(1.905,-2.6) 5(1.905,2.6) 6(0.635,2.6) 7(-0.635,2.6) 8(-1.905,2.6)
  silkscreen extent -2.88,-2.72 2.5,1.1
SO14 [mm] "Small Outline; 14 Leads; Body Width 3.9 mm; Pitch 1.27 mm"
  rect 0.6x2.2 smd: 1(-3.81,-2.6) 2(-2.54,-2.6) 3(-1.27,-2.6) 4(0,-2.6) 5(1.27,-2.6) 6(2.54,-2.6) 7(3.81,-2.6) 8(3.81,2.6) 9(2.54,2.6) 10(1.27,2.6) 11(0,2.6) 12(-1.27,2.6) 13(-2.54,2.6) 14(-3.81,2.6)
  silkscreen extent -4.78,-2.72 4.38,1.1
SO16 [mm] "Small Outline; 16 Leads; Body Width 3.9 mm; Pitch 1.27 mm"
  rect 0.6x2.2 smd: 1(-4.445,-2.6) 2(-3.175,-2.6) 3(-1.905,-2.6) 4(-0.635,-2.6) 5(0.635,-2.6) 6(1.905,-2.6) 7(3.175,-2.6) 8(4.445,-2.6) 9(4.445,2.6) 10(3.175,2.6) 11(1.905,2.6) 12(0.635,2.6) 13(-0.635,2.6) 14(-1.905,2.6) 15(-3.175,2.6) 16(-4.445,2.6)
  silkscreen extent -5.42,-2.72 5,1.1
SO20W [mm]
  rect 2.6x0.8 smd: 1(0,0)
  oval 2.6x0.8 smd: 2(0,-1.27) 3(0,-2.54) 4(0,-3.81) 5(0,-5.08) 6(0,-6.35) 7(0,-7.62) 8(0,-8.89) 9(0,-10.16) 10(0,-11.43) 11(9.2,-11.43) 12(9.2,-10.16) 13(9.2,-8.89) 14(9.2,-7.62) 15(9.2,-6.35) 16(9.2,-5.08) 17(9.2,-3.81) 18(9.2,-2.54) 19(9.2,-1.27) 20(9.2,0)
  silkscreen extent 0.8,-12.51 8.4,1.09
SOD-80/MLL34 [mm] "Metal Electrode Face (MELF) Diode; Body 3.5 x 1.7 mm (LxDia)"
  rect 1.4x1.8 smd: 1(-1.7,0) 2(1.7,0)
  silkscreen extent -0.7,-0.8 0.7,0.8
SOT-23 [mil]
  rect 36x36 smd: 1(0,0) 2(75,0)
  rect 36x50 smd: 3(38,80)
  silkscreen extent -20,-5 95,85
SUPERCAP [mil] "EECF5R5U155"
  round 90 hole 50: 1(0,0) 2(196.85,0)
  silkscreen extent -328,-423 518,423
SW-4P-S [mm]
  round 1.8 hole 1: 1(0,0) 2(0,-4.47) 3(6.502,-4.47) 4(6.477,0.025)
  silkscreen extent -0.91,-5.18 7.34,0.79, body extent -0.86,-5.23 7.35,0.76, height 9.52
TC3528-1411 [mm] "Capacitor, SM Tantalum; Body 3.5 x 2.8 mm (LxW typ)"
  rect 2x2.2 smd: 1(-1.5,0) 2(1.5,0)
  silkscreen extent -2.82,-1.5 1.85,1.62
TC6032-2412 [mm] "Capacitor, SM Tantalum; Body 6.0 x 3.2 mm (LxW typ)"
  rect 2.6x2.2 smd: 1(-2.5,0) 2(2.5,0)
  silkscreen extent -3.92,-1.75 3.15,1.87
TERMINAL2 [mil] "9.5mm 2 terminal block connnetor - screw M3"
  round 120 hole 60: 1(-187.01,0) 2(187.01,0)
  silkscreen extent -380,-155 380,475
TO170P1420-6N [mm] "D2-PAK, 6-Leads, Body 8.9x10.1mm, Pitch 1.7mm, Lead Span 14.2mm, IPC Medium Density"
  rect 3.2x1.05 smd: 1(-6,3.4) 2(-6,1.7) 3(-6,0) 4(-6,-1.7) 5(-6,-3.4)
  rect 8.3x10.45 smd: 6(3.45,0)
  silkscreen extent -6.13,-5.2 -1.1,5.2, body extent -3.35,-5.2 6.05,5.2, height 4.65
TO254P1420-3_4M [mm] "D2-PAK, 4-Leads, Body 9.2x10mm, Pitch 2.54mm, Lead Span 14.2mm, IPC Low Density"
  rect 3.6x1.1 smd: 1(-6.1,2.54) 3(-6.1,-2.54)
  rect 8.7x10.55 smd: 4(3.55,0)
  silkscreen extent -6.22,-5.1 -1.2,5.1, body extent -2.9,-5.13 6.45,5.13, height 4.57
XTAL [mil]
  round 65 hole 35: 1(0,0) 2(200,0)
  silkscreen extent -100,-80 300,80
XTAL-SMD [mil]
  rect 120x35 smd: 1(0,0) 2(350,0)
  silkscreen extent -25,-80 375,80

## Part data
B1 J1 J4 J6 J7 J8 J9: library part CON2, "Connector"
C1 C2 C3 C4 C9 C10 C13 C15 C16 C17 C18 C21 C22 C23 C24 C27 C28 C29 C30 C31 C32 C33 C34 C35 C37 C39 C42: library part CAP, "Capacitor"
C5 C7 C8 C11 C36 C40 C41: library part "CAPACITOR POL", "Capacitor"
C6 C12 C38 SC1: library part ELECTRO1, "Electrolytic Capacitor"
C14: "Capacitor"
C20: library part "Cap Pol1", "Polarized Capacitor (Radial)"
C25 C26: library part Cap, "Capacitor"
D1 D2 D3 D8 D13 LED1 LED2 LED3: library part DIODE
D4 D5 D9 D10 D12 D15: library part "Diode 1N4007", "1 Amp General Purpose Rectifier"
D6 D7 D11 D14 D18: library part ZENER2, "Zener Diode"
D19: library part DIODE, "Hoangphat"
F1 F2: library part FUSE2, "Fuse"
J2: library part "Phonejack Stereo SW", "3-Conductor Jack with 2 break contacts (normals) and 2 auxiliary make contacts"
J3: library part "Header 3X2", "Header, 3-Pin, Dual row"
J10 J11: library part Con2, "Connector 2"
JP1: library part "Header 2", "Header, 2-Pin"
K1 K2 K3 K4: library part Relay-SPDT, "G5LA-10A/250VAC / SRC-12VDC-SL-C"
L1 L2 L5 L10 L11 L14 L15: library part "INDUCTOR IRON"
L4 L6 L12 L13: library part INDUCTOR
LCD1: "ST7920 LCD128X64"
LED4 LED5 LED6 LED7 LED8: library part LED3, "Typical BLUE SiC LED"
MD1: library part CON29, "Connector"
P1: library part "Header 8", "Header, 8-Pin"
Q1 Q2 Q3 Q8 Q9 Q10: library part NPN1, "NPN Transistor"
Q4 Q5 Q6 Q12: library part PNP1, "PNP Transistor"
Q7 Q11: "P-Channel MOSFET"
Q13: "P-Channel Power MOSFET"
Q14: "N-Channel Power MOSFET"
R1 R2 R3 R4 R5 R6 R7 R8 R9 R25 R26 R27 R28 R29 R33 R34 R35 R36 R38 R39 R40 R41 R49 R50 R51 R52 R53 R54 R55 R56 R57 R58 R60 R61 R62 R63 R64 R65 R67 R68 R70 R71 R72: library part "Res Semi", "Semiconductor Resistor"
R10 R11 R12 R13 R14 R15 R16 R17 R18 R19 R20 R21 R22 R23 R24 R37 R73 R74 R75 R76 R77 R78: library part RES2
R30 VR2: library part RPot, "Potentiometer"
R31 R32 R42 R43 R44 R45 R46 R47 R48 R66 R69: library part RES1
SW1 SW2: library part SW4-1, "Switch button 4 pin"
U2: "Multipoint RS-485/RS-422 Transceivers"
U3 U12: library part MC7805T
U5: library part 74LS02
U7: library part ATmega64-16AC, "8-Bit AVR Microcontroller with 64K Bytes of In-System Programmable Flash Memory"
U8 U15 U16: "Low Power Dual Operational Amplifier, 8-pin Narrow SOIC"
U11: library part Component_1
U17: library part LM1117IMP-3.3, "800mA Low-Dropout Linear Regulator, 4-pin SOT-223"
Y3 Y4: library part XTAL, "Crystal Oscillator"
Y5: library part CRYSTAL, "Crystal"

## Free pads (board coordinates)
  round 10 hole 80 slot 300 at 0 deg: 0(-1460,3030)
  round 10 hole 80 slot 300 at 135 deg: 0(-545,2695)
  round 235 hole 125: 0(-405,6580) 0(-225,560) 0(7398.43,278.74) 0(8235,6700)
  round 10 hole 60 slot 300 at 90 deg: 0(600,1125)
  round 10 hole 80 slot 300 at 90 deg: 0(950,-150) 0(1315,620) 0(1330,-150) 0(1710,-150)
  round 365 on Top Overlay: 0(5975,4389.21) 0(6475,3889.21) 0(6475,4889.21) 0(6975,4389.21)

## Via types
v1: diameter 50, hole 28, Top Layer to Bottom Layer, 38 vias
v2: diameter 60, hole 30, Top Layer to Bottom Layer, 32 vias
v3: diameter 50, hole 25, Top Layer to Bottom Layer, 23 vias
v4: diameter 45, hole 25, Top Layer to Bottom Layer, 22 vias
v5: diameter 40, hole 25, Top Layer to Bottom Layer, 9 vias
v6: diameter 60, hole 32, Top Layer to Bottom Layer, 8 vias
v7: diameter 45, hole 24, Top Layer to Bottom Layer, 1 vias

## Nets (pads, with @x,y where several pads share a name; then routed paths per layer and width w, separated by ;. In a path a pad name is that pad's centre, name@x,y a point inside that pad or via, vN(x,y) a via of type N, cw(c..) or ccw(c..) an arc to the next point about the centre after c; other vN are vias at no path point)
12VDC_OUT: D9.2 K3.3 K3.4 R60.2 U11.6 | length 2325
  Top Layer w25: 4845.98,3142.91 5014.57,3311.5 R60.2@5014.57,3574.21 ; D9.2@5441.93,2769.21 5441.93,2667.28 5445,2664.21
  Top Layer w60: 4845.98,3142.91 4990,2998.9 4990,2779.21 5105,2664.21 5445,2664.21 5555,2664.21 5637.44,2746.65 K3.4@5637.44,2839.21
  Bottom Layer w60: K3.3@5637.44,2366.77 K3.4@5637.44,2839.21
+12: C40.1 L12.2 L13.1 R66.2 | length 1342.9
  Top Layer w25: R66.2@4595.87,2119.21 4780.87,1934.21 5110,1934.21 v3(5145,1934.21)
  Top Layer w60: C40.1@4960,1389.21 4960,1509.21 5096.22,1645.43 L12.2@5096.22,1754.21 5110,1767.99 5110,1934.21 L13.1@5110,2044.21
+BAT1_OUT: D13.1 J1.1 J10.1 J10.2 U6.3 U6.4
+BAT2_IN: J4.2 U14.1 U14.2
+LAMP_OUT: D7.2 Q7.3 U1.3 U1.4 | length 298.3
  Top Layer w30: Q7.3@6920,694.37 6920,806.14 D7.2@6948.07,834.21
  Top Layer w150: U1.4@6750,674.21 6840,674.21 6880.16,714.37
+VLAMP: K1.1 R3.1 U1.1 U1.2 | length 793.4
  Top Layer w15: 6380,849.21 R3.1@6380,978.78
  Top Layer w150: K1.1@6066.22,767.95 6147.48,849.21 6380,849.21 6480,749.21 6480,674.21 U1.1@6580,674.21
A: P1.3 P1.4 R68.2 R71.1 U2.6 | length 951.1
  Top Layer w15: R68.2@6940,5269.65 7000,5329.65 P1.4@7000,5369.21 7075,5294.21 7180,5294.21 7195,5279.21 7195,5249.21 7205,5239.21 7211.57,5239.21 7235,5215.78 7235,5182.64 7195,5142.64 7195,5084.21 7185,5074.21 7115,5074.21 7100,5089.21 U2.6@7100,5141.57
  Top Layer w20: R71.1@6959.57,5549.21 6959.57,5478.78 P1.3@6950,5469.21 6950,5444.21 7000,5394.21 P1.4@7000,5369.21
"AC SWITCHER": D6.1 U7.9 | length 339.2
  Top Layer w15: D6.1@4021.93,3969.21 4065,3969.21 4274.42,4178.63
ADC_BAT_LAMP: C3.1 R1.2 R2.1 U7.57 | length 3606.8
  Top Layer w15: U7.57@4368.42,4550.46 4368.42,4199.37 4568.58,3999.21 5307.5,3999.21 5807.5,3499.21 5807.5,3446.71 6046.79,3207.42 6046.79,3122.42 5992.68,3068.31 ; v1(6160,989.21) 6202.68,1031.89
  Top Layer w20: R2.1@5785,399.65 R1.2@5865,399.65 ; C3.1@5865,468.78 R1.2@5865,399.65 ; v1(6050,594.21) 6050,494.21 5955.43,399.65 R1.2@5865,399.65
  Bottom Layer w20: v1(6050,594.21) 6160,704.21 v1(6160,989.21)
ADC_CELL: Q13.3 U7.61 | length 1756.3
  Top Layer w15: U7.61@4494.42,4550.46 4494.42,4214.79 4610,4099.21 4680,4099.21 4705,4124.21 v1(4805,4124.21) ; v1(4960,4174.21) 5015,4229.21 5045,4229.21 5100,4284.21 5100,4449.21 5260,4609.21 5350,4609.21 5445,4704.21 5445,4779.09
  Bottom Layer w15: v1(4805,4124.21) 4855,4174.21 v1(4960,4174.21)
ADC_ICHARGE1: R74.2 U7.56 U16.1 | length 913.8
  Top Layer w15: 4337.42,3636.63 U7.56@4337.42,4550.46
ADC_ICHARGE2: R78.2 U7.54 U16.7
ADC_ILAMP: R16.2 U7.60 U8.1 | length 2690.9
  Top Layer w15: U7.60@4462.42,4550.46 4462.42,4211.44 4599.64,4074.21 5341.07,4074.21 5882.5,3532.78 5882.5,3480.9 6124.29,3239.11 6124.29,3093.86 6080,3049.57 ; 6080,2418.86 6114.64,2384.21
ADC_MAIN: C9.1 R26.2 R28.1 U7.58 | length 3599.5
  Top Layer w15: U7.58@4400.42,4550.46 4400.42,4202.73 4578.93,4024.21 5320.36,4024.21 5340.18,4004.39 5832.5,3512.07 5832.5,3457.07 6071.79,3217.78 6071.79,3112.07 6022.68,3062.96 ; 6232.68,1016.53 6255,994.21 v1(6255,989.21)
  Top Layer w20: v1(6130,594.21) 6105,569.21 6105,434.21 6134.57,404.65 R26.2@6255,404.65 ; C9.1@6255,468.78 R26.2@6255,404.65 ; R28.1@6340,404.65 R26.2@6255,404.65
  Bottom Layer w20: v1(6130,594.21) 6210,674.21 6210,944.21 v1(6255,989.21)
ADC_VAC: C8.1 R22.1 U7.55 | length 1053.9
  Top Layer w15: 4305.42,3679.63 U7.55@4305.42,4550.46 ; R22.1@6195,8022.28 6378.07,8022.28
ADC_VLAMP: C4.1 R3.2 R5.1 U7.59 | length 2930.3
  Top Layer w15: U7.59@4431.42,4550.46 4431.42,4207.08 4589.29,4049.21 5330.71,4049.21 5857.5,3522.42 5857.5,3470.54 6099.29,3228.75 6099.29,3104.21 6055,3059.92 ; 6265,1189.21 6330.43,1123.78 C4.1@6380,1123.78 R3.2@6380,1049.65 R5.1@6460,1049.65
AGND: C7.2 C8.2 L15.1 R24.2 U15.3 U15.8 VR2.1 | length 1015.3
  Top Layer w10: 5890,7829.21 v7(5915,7829.21) 5940,7829.21 ; R24.2@6020,8022.28 6098.43,8100.71 C7.2@6098.43,8141.85
  Top Layer w40: VR2.1@5685,8479.21 5815,8349.21 5990,8349.21 6098.43,8240.79 C7.2@6098.43,8141.85 6298.58,8141.85 C8.2@6300,8143.27
  other v2: 4195,3674.21 6205,8141.85
B: P1.5 P1.6 R71.2 R72.1 U2.7 | length 957.6
  Top Layer w15: R72.1@7064.57,5239.21 7050,5224.65 U2.7@7050,5141.57 7050,5103.86 7104.64,5049.21 7195.36,5049.21 7220,5073.86 7220,5132.29 7260,5172.29 7260,5226.14 7220,5266.14 7220,5294.21 7195,5319.21 7150,5319.21 P1.6@7100,5369.21
  Top Layer w20: R71.2@7030.43,5549.21 7030.43,5488.78 P1.5@7050,5469.21 7050,5444.21 7100,5394.21 P1.6@7100,5369.21
BACKLIGHT: C13.1 Q1.2 R34.2 | length 294.4
  Top Layer w15: R34.2@5130,5644.13 5155,5619.13 5155,5514.57 5190,5549.57 Q1.2@5295,5549.57
BAT_LAMP: D14.2 D15.2 D18.2 K1.2 K4.1 K4.5 Q11.3 R1.1 R62.2 R67.2 | length 2807
  Top Layer w20: K4.1@3806.26,1567.95 3885,1489.21 K4.5@3885,1304.21 ; K1.2@5820,216.77 5865,261.77 R1.1@5865,328.78
  Top Layer w25: 3436.93,1792.28 D18.2@3436.93,1649.21 ; v3(3490,1649.21) D18.2@3436.93,1649.21 ; R62.2@3530,1574.65 3526.5,1571.14 3440,1571.14 3436.93,1574.21 v3(3436.93,1611.71) D18.2@3436.93,1649.21 ; K4.5@3885,1304.21 3985,1404.21 3985,1652.28 D15.2@3985,1657.28 ; 8665,3289.21 R67.2@8734.57,3289.21
  Bottom Layer w150: 4461.22,1540.43 4710,1789.21 5195,1789.21 5280,1704.21 5440,1704.21 5620,1524.21 ; K1.2@5830,216.77 5830,394.21
BATTERY: K3.2 K4.3 L13.2 | length 1636.7
  Top Layer w50: L13.2@5110,2134.21 5110,2311.77 K3.2@5165,2366.77
  Bottom Layer w80: K4.3@4357.44,1776.65 4357.44,2151.65 4705,2499.21 5032.56,2499.21 K3.2@5165,2366.77
  other v3: 5145,2174.21
BATTERY24V_IN: J4.1 Q11.4 U14.3 U14.4
BIU: MD1.27 R44.1 | length 811.4
  Top Layer w15: R44.1@1010.43,5584.21 1165,5584.21 1435,5854.21 MD1.27@1710,5854.21
BTGND: C3.2 C9.2 C40.2 D19.1 F1.2 J9.1 J11.1 J11.2 LED4.2 LED7.2 Q9.2 Q10.2 R4.2 R38.2 R64.1 R65.1 R69.2 R70.1 U13.3 U13.5 U13.6 U17.1 U17.4 | length 4965.9
  Top Layer w20: R4.2@5785,539.65 C3.2@5865,539.65 5934.57,539.65 v1(5935,539.21) ; v1(6180,539.21) 6254.57,539.21 C9.2@6255,539.65 R38.2@6340,539.65
  Top Layer w25: R70.1@3260,1388.78 R64.1@3260,1289.65 3205.43,1289.65 3195,1279.21 3195,1164.21 3230,1129.21 v3(3590,1129.21) ; Q10.2@3590,1324.21 v3(3590,1129.21) ; Q9.2@3725,1324.21 3725,1263.78 R65.1@3720.43,1259.21 3720.43,1199.65 ; 3743.27,1176.81 3720.43,1199.65 ; LED4.2@9570,236.81 9577.4,244.21 v6(9655,244.21) ; v3(3590,1129.21) 3650,1129.21 3720.43,1199.65
  Top Layer w40: v3(3814.17,2119.21) U13.3@4186.22,2119.21 R69.2@4380,2119.21 ; U13.6@3948.03,2253.07 U13.5@4186.22,2253.07
  Bottom Layer w20: 5355,1229.21 F1.2@5355,1319.21
  Bottom Layer w30: v1(5935,539.21) 5935,284.21 6080,139.21 ; 5990,49.21 6080,139.21 ; v1(6180,539.21) 6180,239.21 6080,139.21
  Bottom Layer w50: C40.2@4760,1389.21 4760,1219.21 4770,1209.21
  Bottom Layer w100: F1.2@5355,1319.21 5355,1414.21 F1.2@5355,1519.21
  Bottom Layer w150: J11.2@2472.2,-155 J11.1@2846.22,-155 ; 4770,1434.21 4875,1539.21 5075,1539.21 5200,1414.21 5355,1414.21
  other v3: 3655,1939.21 3814.17,1939.21 3955,1939.21 3655,2029.21 3814.17,2029.21 3955,2029.21 3655,2119.21 3955,2119.21 3655,2214.21 3814.17,2214.21 3955,2214.21 3655,2299.21 3814.17,2299.21 3955,2299.21
  other v6: 8820,3069.21
CHR_BAT_CEL1: D8.1 U7.14 | length 255
  Top Layer w15: U7.14@4678.42,5048.46 4727.83,5048.46 4770,5090.63 4770,5189.69 4774.88,5194.57 D8.1@4774.88,5234.57
DB0: LCD1.7 U7.51 | length 547.4
  Top Layer w12: 3457,5619.99 LCD1.7@3606.1,5769.1
  Top Layer w15: 3950.21,4375.4 4025.27,4450.46 4138.13,4450.46 4180.42,4492.75 U7.51@4180.42,4550.46
DB1: LCD1.8 U7.50 | length 562.9
  Top Layer w12: 3479,5610.88 3577.69,5709.57 3646.57,5709.57 LCD1.8@3683.29,5746.28
  Top Layer w15: 3939.86,4400.4 4014.92,4475.46 4127.78,4475.46 4148.42,4496.11 U7.50@4148.42,4550.46
DB2: LCD1.9 U7.49 | length 613.6
  Top Layer w12: 3501,5601.77 3586.8,5687.57 3659.47,5687.57 3681.47,5709.57 3746.57,5709.57 LCD1.9@3785,5747.99
  Top Layer w15: 3929.5,4425.4 4004.56,4500.46 4117.42,4500.46 U7.49@4117.42,4550.46
DB3: LCD1.10 U7.48 U9.5 | length 473.6
  Top Layer w12: 3523,5592.66 3595.91,5665.57 3668.59,5665.57 3690.59,5687.57 3755.69,5687.57 3777.69,5709.57 3846.57,5709.57 LCD1.10@3880,5742.99
  Top Layer w15: 3987.98,4602.02 U7.48@4026.42,4640.46
DB4: LCD1.11 U7.47 U9.6 | length 503.1
  Top Layer w12: 3605.03,5643.57 3677.7,5643.57 3699.7,5665.57 3764.8,5665.57 3786.8,5687.57 3855.69,5687.57 3877.69,5709.57 3946.57,5709.57 LCD1.11@4006.1,5769.1
  Top Layer w15: 3976.42,4671.46 U7.47@4026.42,4671.46
DB5: LCD1.12 U7.46 | length 607.4
  Top Layer w12: 3614.14,5621.57 3686.81,5621.57 3708.81,5643.57 3773.91,5643.57 3795.91,5665.57 3864.8,5665.57 3886.8,5687.57 3955.69,5687.57 3977.69,5709.57 4046.57,5709.57 LCD1.12@4106.1,5769.1
  Top Layer w15: 3972.07,4702.46 U7.46@4026.42,4702.46
DB6: LCD1.13 U7.45 | length 741.9
  Top Layer w12: 3601.25,5577.57 3623.25,5599.57 3695.92,5599.57 3717.92,5621.57 3783.03,5621.57 3805.03,5643.57 3873.91,5643.57 3895.91,5665.57 3964.8,5665.57 3986.8,5687.57 4055.69,5687.57 4076.34,5708.22 4145.23,5708.22 LCD1.13@4206.1,5769.1
  Top Layer w15: 3968.71,4734.46 U7.45@4026.42,4734.46
DB7: LCD1.14 U7.44 | length 845.6
  Top Layer w12: 3611,5555.57 3633,5577.57 3705.04,5577.57 3727.04,5599.57 3792.14,5599.57 3814.14,5621.57 3883.03,5621.57 3905.03,5643.57 3978,5643.57 4000,5665.57 4064.8,5665.57 4085.46,5686.22 4154.34,5686.22 4177.69,5709.57 4246.57,5709.57 LCD1.14@4306.1,5769.1
  Top Layer w15: 3964.36,4765.46 U7.44@4026.42,4765.46
DE/RE: U2.2 U2.3 U7.5 | length 3294
  Top Layer w15: U7.5@4678.42,4765.46 4814.11,4765.46 4835,4744.57 4835,4684.21 4863.09,4656.12 4967.27,4656.12 4990.36,4679.21 5089.64,4679.21 5105,4694.57 5105,4768 5140,4803 5140,4838.21 5145.06,4843.26 5145.06,4929.27 5217.86,5002.07 5711.79,5002.07 5744.64,4969.21 5835,4969.21 5860.75,4994.96 5861.5,4994.21 5908.5,4994.21 5935,5020.71 5935,5043.5 5990,5098.5 5990,5229.21 6035,5274.21 6470,5274.21 6680.36,5063.86 6754.64,5063.86 6804.29,5014.21 6940,5014.21 6955,4999.21 6955,4879.21 6970,4864.21 7035,4864.21 7050,4879.21 U2.2@7050,4936.85 U2.3@7100,4936.85
E: LCD1.6 U5.4 | length 897.8
  Top Layer w15: U5.4@3955,5536.57 3955,5609.21 4090,5609.21 v1(4110,5629.21)
  Bottom Layer w15: LCD1.6@3506.1,5769.1 3585.99,5689.21 4050,5689.21 v1(4110,5629.21)
FG: U11.1